# Altium PCB PCB1.PcbDoc
Units mm, origin at the board's own origin, x right, y up, seen from the top; angles counter-clockwise.
Board outline 70.87 x 49.4 mm, 2 copper layers (Top Layer, Bottom Layer); 31 components, 13 nets, 109 pads, 4 vias.
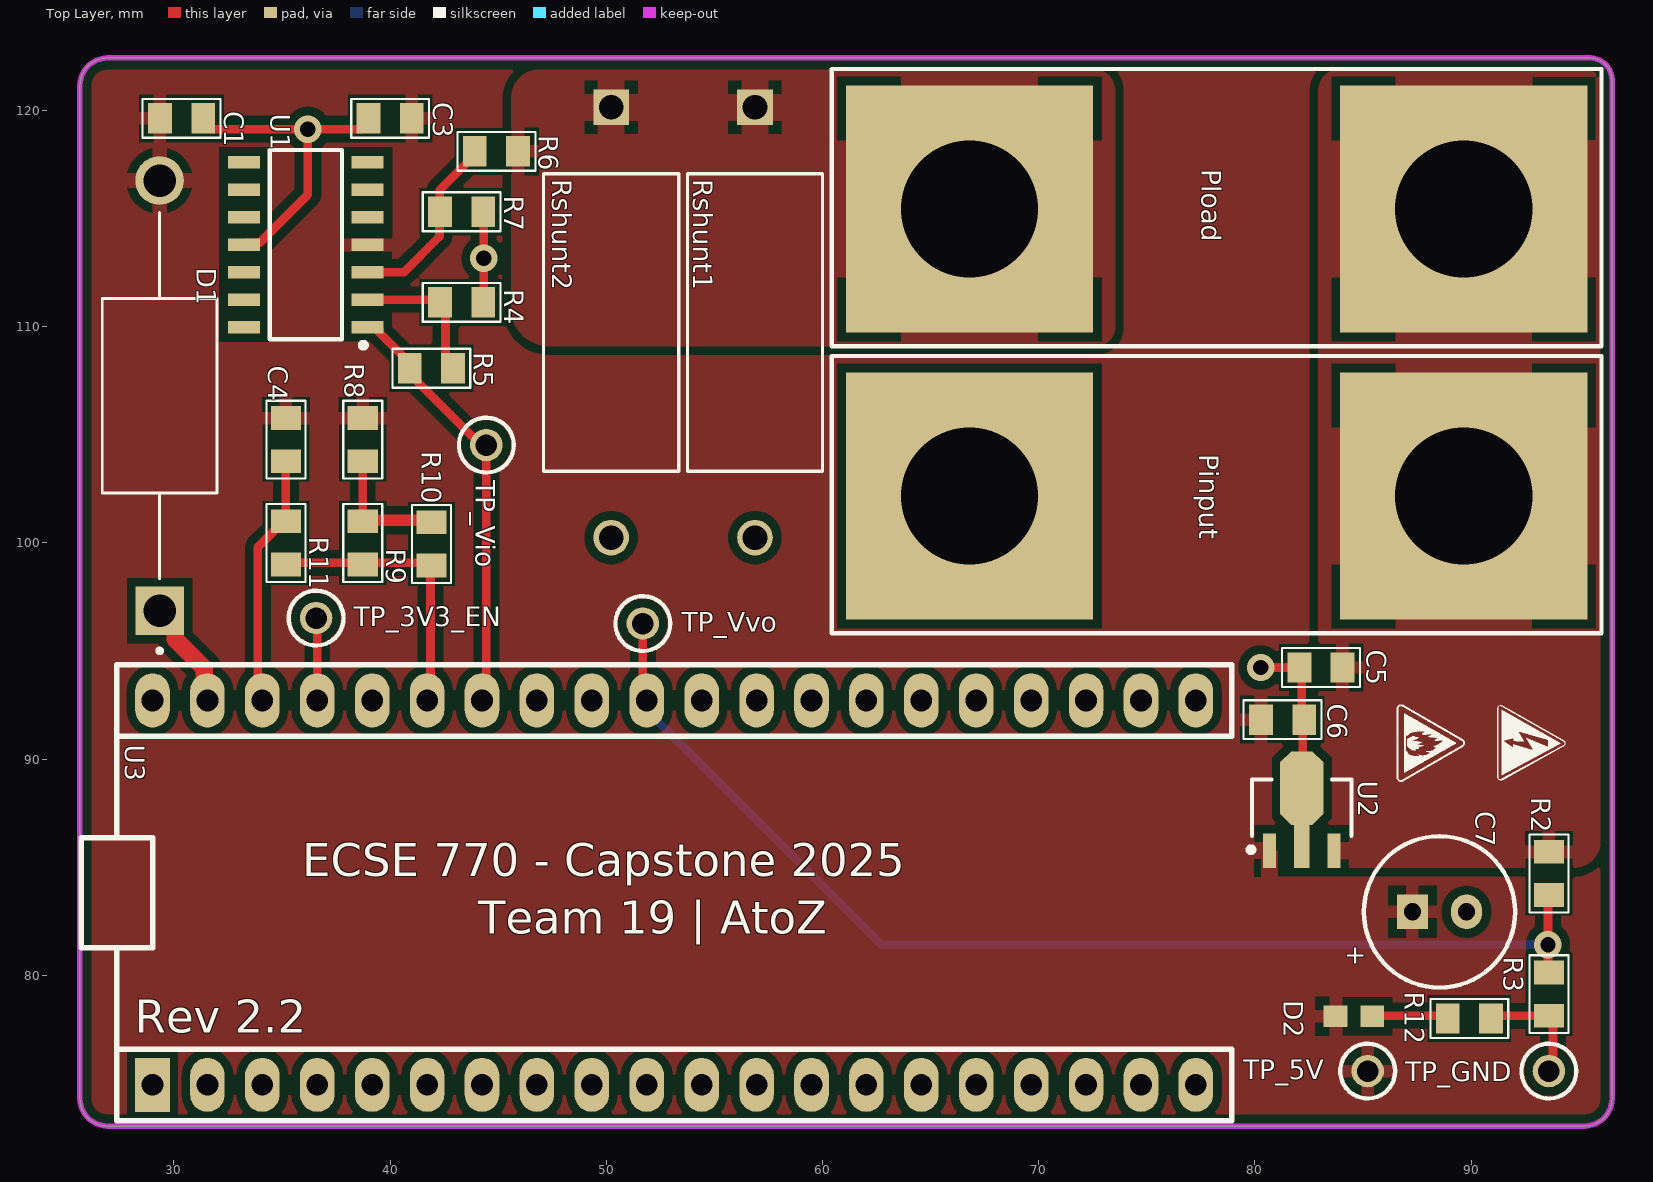
[diagram p0: Top Layer view]
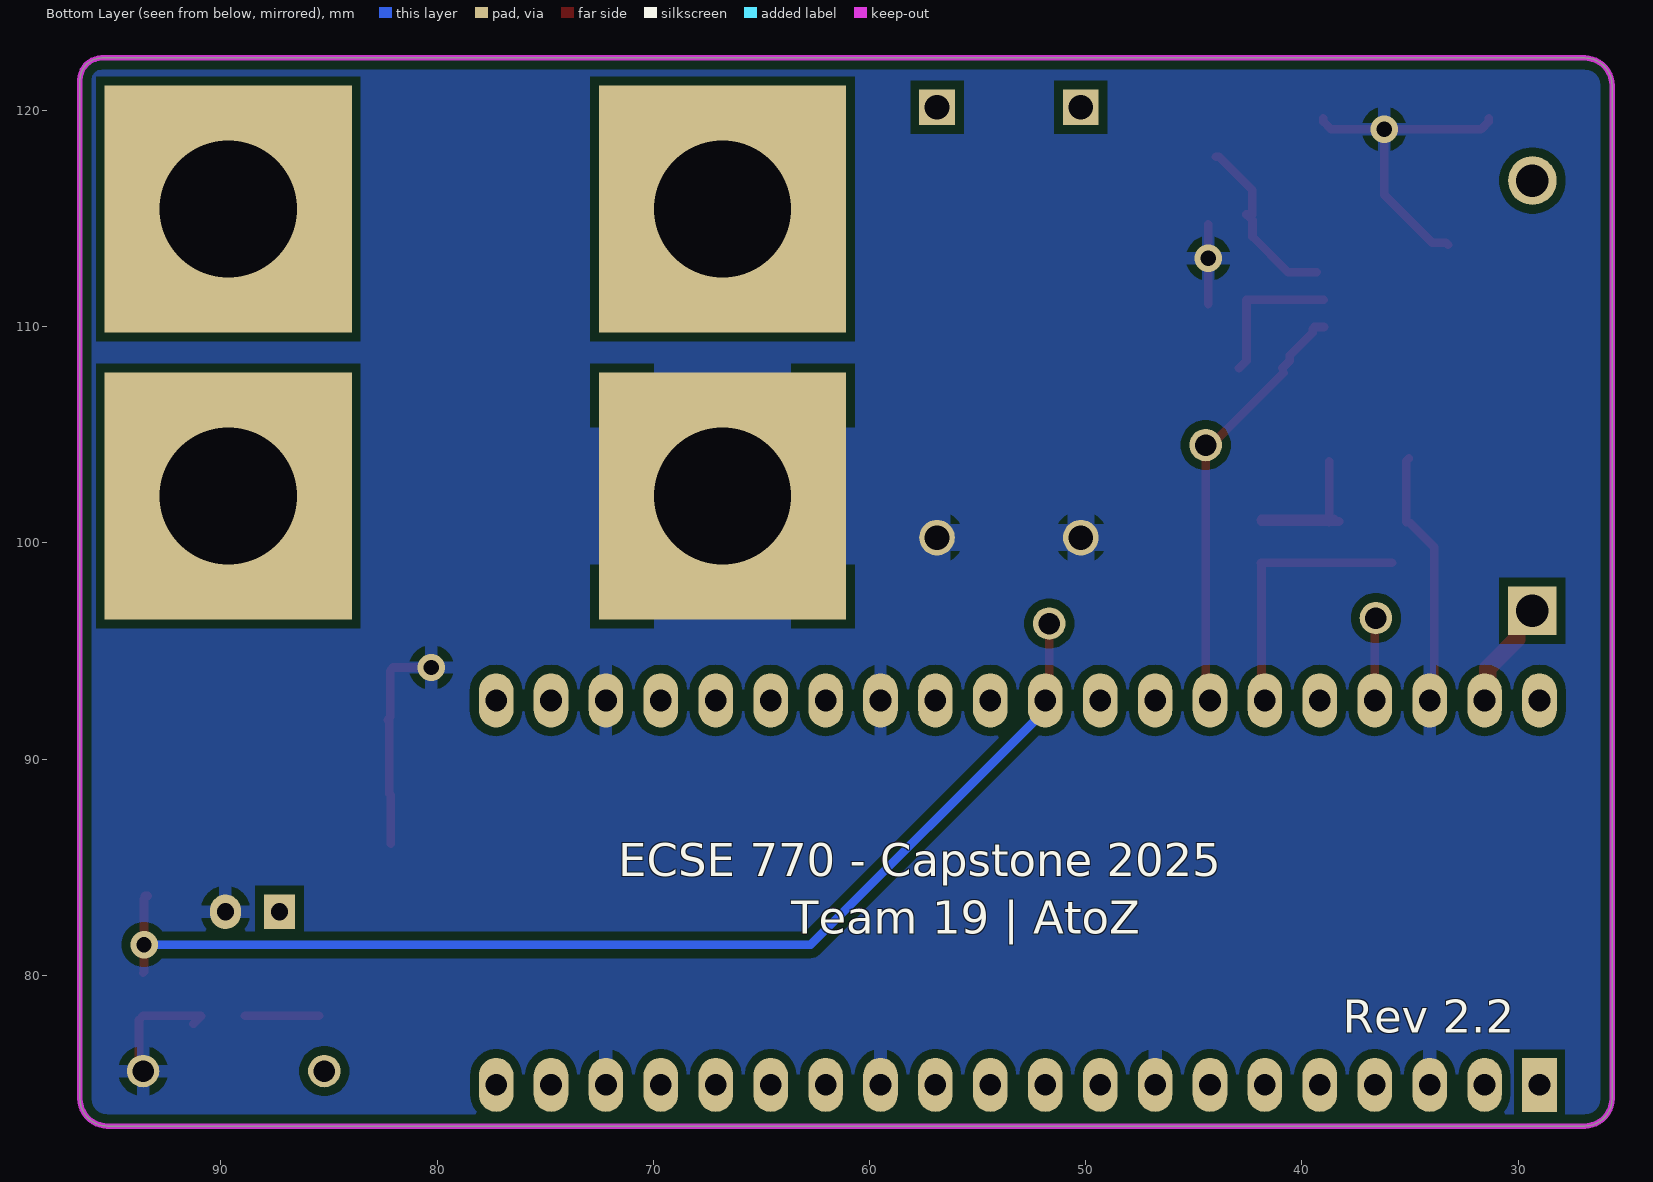
[diagram p1: Bottom Layer view, seen from below]

## Layer stack, top to bottom
Top Solder: solder mask 0.0102, Solder Resist, Dk 3.5
Top Layer: signal copper 0.0356
Dielectric 1: dielectric 0.32, FR-4, Dk 4.8
Bottom Layer: signal copper 0.0356
Bottom Solder: solder mask 0.0102, Solder Resist, Dk 3.5

## Board outline
26.924,73.025 cw(c26.924,74.295) 25.654,74.295 25.654,121.158 cw(c26.924,121.158) 26.924,122.428 95.504,122.428 cw(c95.504,121.412) 96.52,121.412 96.52,74.295 cw(c95.25,74.295) 95.25,73.025

## Design rules (kind name [scope] priority, off if disabled: settings)
Clearance [All] p1: gap=0.4 ignorepadtopadclearanceinfootprint=FALSE
HoleSize [All] p1: absolutevalues=TRUE maxlimit=10 minlimit=0.4 maxpercent=80.000 minpercent=20.000
PlaneConnect [All] p1: planeconnectstyle=Relief reliefexpansion=0.508 reliefentries=4 reliefconductorwidth=0.508 reliefairgap=0.254
PolygonConnect [All] p1: connectstyle=Relief reliefconductorwidth=0.6 reliefentries=4 polygonreliefangle="90 Angle" airgapwidth=0.4
RoutingVias [All] p1: holewidth=0.711 width=1.27 viastyle="Through Hole" minholewidth=0.711 minwidth=1.27 maxholewidth=0.711 maxwidth=1.27
SilkToSilkClearance [All] p1: silktosilkclearance=0.1
SilkToSolderMaskClearance [IsPad] p1: minsilkscreentomaskgap=0.1 clearancetoexposedcopper=TRUE
SolderMaskExpansion [All] p1: expansion=0.102 istentingtop=FALSE
SupplyNets "Schematic Supply Nets_8" [InNet('GND')] p1: voltage=0.000
SupplyNets "Schematic Supply Nets_7" [InNet('5V')] p2: voltage=0.000
SupplyNets "Schematic Supply Nets_5" [InNet('Vvo')] p3: voltage=0.000
SupplyNets "Schematic Supply Nets_4" [InNet('ADC_ref')] p4: voltage=0.000
SupplyNets "Schematic Supply Nets_3" [InNet('VCC')] p5: voltage=0.000
SupplyNets "Schematic Supply Nets_2" [InNet('Vio')] p6: voltage=0.000
SupplyNets "Schematic Supply Nets_1" [InNet('Vis')] p7: voltage=0.000
SupplyNets "Schematic Supply Nets" [InNet('Vsys')] p8: voltage=0.000
Width [All] p1: maxlimit=10 minlimit=0.4 preferedwidth=0.4
26 further rules are at their usual default settings.

## Components (designator, comment, footprint, x,y, rotation, side; value= is the part's Value field where it differs from the comment)
C1 "100n" "0805 CAP" 30.353,119.634 r0 top
C3 "100n" "0805 CAP" 40.005,119.634 r180 top
C4 "100n" "0805 CAP" 35.179,104.775 r270 top
C5 "100n" "0805 CAP" 83.058,94.234 r180 top
C6 "1u" "0805 CAP" 81.28,91.821 r0 top
C7 "10u" "CAP-RAD-2.5mm Pitch" 88.539,82.931 r0 top
D1 "SR304" DIOAD1990W125L900D530 29.337,106.807 r90 top
D2 "LTST-C191KRKT" 0603 84.582,78.105 r180 top
Pinput "Dual Banana Plugs" "Dual Banana Plug" 78.232,102.162 r180 top
Pload "Dual Banana Plugs" "Dual Banana Plug" 78.232,115.443 r180 top
R2 "10k" "0805 RES" 93.599,84.709 r90 top
R3 "1.5k" "0805 RES" 93.599,79.121 r90 top
R4 "1.2k" "0805 RES" 43.307,111.125 r180 top
R5 "10k" "0805 RES" 41.91,108.077 r180 top
R6 "1.2k" "0805 RES" 44.918,118.11 r180 top
R7 "10k" "0805 RES" 43.307,115.316 r180 top
R8 "680" "0805 RES" 38.735,104.775 r90 top
R9 "12k" "0805 RES" 38.735,99.994 r90 top
R10 "12k" "0805 RES" 41.91,99.949 r90 top
R11 "10k" "0805 RES" 35.179,99.994 r270 top
R12 "150" "0805 RES" 89.916,78 r180 top
Rshunt1 "ER74R10KT" RES_ER74_TYCO_TYC 56.877,120.142 r270 top
Rshunt2 "ER74R10KT" RES_ER74_TYCO_TYC 50.222,120.142 r270 top
TP_3V3_EN "5003" TP_TH 36.576,96.52 r270 top
TP_5V "5003" TP_TH 85.217,75.565 r0 top
TP_GND "5003" TP_TH 93.599,75.565 r0 top
TP_Vio "5003" TP_TH 44.45,104.521 r270 top
TP_Vvo "5003" TP_TH 51.689,96.266 r270 top
U1 "LM324DR2G" SOIC-14 36.104,113.792 r180 top
U2 "L78L05" SOT-89 82.169,87.757 r90 top
U3 "SC0918" "RP Pico Header V2" 29.011,74.93 r90 top

## Footprints (in the part's own frame and the unit in brackets; to place one, negate y for a bottom-side part, rotate by r counter-clockwise, add the part's x,y. Pads: shape width x height; smd on the part's side, far side on the other; paste and mask are expansions set on the pad)
0603 [mm]
  rect 1.1x1 smd: 1(-0.85,0) 2(0.85,0)
"0805 CAP" [mm] "http://www.digikey.co.nz/Web%20Export/Supplier%20Content/Vishay_8026/PDF/VishayBeyschlag_SolderPad.pdf?redirected=1 with dimension G modified by +0.25mm"
  rect 1.1x1.4 smd: 1(-1,0) 2(1,0)
  silkscreen extent -1.8,-0.9 1.8,0.9, body extent -1.04,-0.66 1.04,0.66, height 0.61
"0805 RES" [mm] "http://www.digikey.co.nz/Web%20Export/Supplier%20Content/Vishay_8026/PDF/VishayBeyschlag_SolderPad.pdf?redirected=1 with dimension G modified by +0.25mm"
  rect 1.1x1.4 smd: 1(-1,0) 2(1,0)
  silkscreen extent -1.8,-0.9 1.8,0.9, body extent -1.04,-0.66 1.04,0.66, height 0.61
"CAP-RAD-2.5mm Pitch" [mm] "Cap 6.3 X 11.2"
  rect 1.45x1.6 hole 0.8: 1(-1.25,0)
  oval 1.45x1.6 hole 0.8: 2(1.25,0)
  silkscreen extent -3.5,-3.5 3.5,3.5, body extent -3.15,-3.15 3.15,3.15, height 11.5
DIOAD1990W125L900D530 [mm]
  round 2.25 hole 1.5: A(9.95,0)
  rect 2.25x2.25 / inner round 2.25 / far side rect 2.25x2.25 hole 1.5: C(-9.95,0)
  silkscreen extent -11.9,-2.65 8.47,2.65, body extent -10.58,-2.8 10.58,2.8, height 5.6
"Dual Banana Plug" [mm] "Connector; 2 Position"
  rect 11.43x11.43 hole 6.35: 1(-11.43,0) 2(11.43,0)
  silkscreen extent -17.8,-6.48 17.8,6.35, body extent -17.38,-5.99 17.43,5.99, height 5.5
RES_ER74_TYCO_TYC [mil]
  rect 65x65 hole 45 paste-99999 mask+0: 1(0,0)
  round 65 hole 45 paste-99999 mask+0: 2(783.5,0)
  silkscreen extent 121,-123 663,123, body extent -17,-118 801,118, height 236
"RP Pico Header V2" [mm]
  rect 2.5x1.6 hole 1: 1(0,0)
  oval 2.5x1.6 hole 1: 2(0,-2.54) 3(0,-5.08) 4(0,-7.62) 5(0,-10.16) 6(0,-12.7) 7(0,-15.24) 8(0,-17.78) 9(0,-20.32) 10(0,-22.86) 11(0,-25.4) 12(0,-27.94) 13(0,-30.48) 14(0,-33.02) 15(0,-35.56) 16(0,-38.1) 17(0,-40.64) 18(0,-43.18) 19(0,-45.72) 20(0,-48.26) 21(17.78,-48.26) 22(17.78,-45.72) 23(17.78,-43.18) 24(17.78,-40.64) 25(17.78,-38.1) 26(17.78,-35.56) 27(17.78,-33.02) 28(17.78,-30.48) 29(17.78,-27.94) 30(17.78,-25.4) 31(17.78,-22.86) 32(17.78,-20.32) 33(17.78,-17.78) 34(17.78,-15.24) 35(17.78,-12.7) 36(17.78,-10.16) 37(17.78,-7.62) 38(17.78,-5.08) 39(17.78,-2.54) 40(17.78,0)
  silkscreen extent -1.65,-49.91 19.43,3.3, body extent -1.61,-49.66 19.39,2.67, height 12.6
SOIC-14 [mm] "SOIC, 14-Leads, Body 8.75x4mm, Pitch 1.27mm"
  rect 1.48x0.58 smd: 1(-2.86,3.81) 2(-2.86,2.54) 3(-2.86,1.27) 4(-2.86,0) 5(-2.86,-1.27) 6(-2.86,-2.54) 7(-2.86,-3.81) 8(2.86,-3.81) 9(2.86,-2.54) 10(2.86,-1.27) 11(2.86,0) 12(2.86,1.27) 13(2.86,2.54) 14(2.86,3.81)
  silkscreen extent -2.79,-4.38 1.67,4.77, body extent -3.1,-4.38 3.1,4.37, height 1.75
SOT-89 [mm] "SOT89, 3-Leads, Body 4.5x2.4 mm, Pitch 1.5mm, Lead Span 4.1mm, IPC Low Density"
  rect 1.6x0.6 smd: 1(-2,1.5) 3(-2,-1.5)
  rect 2x0.7 smd: 2(-1.8,0)
  oct 3.4x2 smd: 2(0.9,0)
  silkscreen extent -2.07,-2.3 1.3,2.47, body extent -2.25,-2.29 2,2.29, height 1.6
TP_TH [mm] "Test Point, Through Hole, Dia 2.54mm"
  round 1.5 hole 1: 1(0,0)
  silkscreen extent -1.27,-1.27 1.27,1.27, body extent -1.27,-1.27 1.27,1.27, height 4.57

## Part data
C1 C3 C4 C5 C6: library part CerCap_SMT_0805, "SMT ceramic capacitor 0805 size"
C7: library part ElecCap_TH_2P0, "Electrolytic capacitor with radial package, 2mm pitch and 5.2mm diameter", LatestRevisionDate=17-Jul-2002, LatestRevisionNote="Re-released for DXP Platform.", PackageDescription="Polarized Capacitor; 2 Leads", PackageReference=POLAR0.8, Published=8-Jun-2000, Publisher="Altium Limited"
D1: "3A, 40V, Schottky Rectifier", Package="DO-201AD Taiwan Semiconductor", Check_prices=https://www.snapeda.com/parts/SR304/Taiwan+Semiconductor/view-part/?ref=eda, MF="Taiwan Semiconductor", MP=SR304, SnapEDA_Link=https://www.snapeda.com/parts/SR304/Taiwan+Semiconductor/view-part/?ref=snap
D2: "http://octopart.com/ltst-c190krkt-lite-on-549893", Package=None, Availability=Unavailable, MP=LTST-C191KRKT, Price=None
Pinput Pload: library part AC_Output, "Dual banana plugs connection to the AC load", LatestRevisionDate=17-Jul-2002, LatestRevisionNote="Re-released for DXP Platform.", Publisher="Altium Limited"
R2 R3 R4 R5 R6 R7 R8 R9 R10 R11 R12: library part Res_SMT_0805, "0805 resistor", ComponentLink1Description=https://nz.mouser.com/datasheet/2/315/AOA0000C304-1149620.pdf, LatestRevisionDate=17-Jul-2002, LatestRevisionNote="Re-released for DXP Platform.", PackageReference=AXIAL-0.4, Published=8-Jun-2000, Publisher="Altium Limited"
Rshunt1 Rshunt2: "No Description Available", Mfr_Name="TE Connectivity", Digi-Key_Part_Number_1=A105885CT-ND, Digi-Key_Part_Number_2=A105885TB-ND
TP_3V3_EN TP_5V TP_GND TP_Vio TP_Vvo: library part TestPoint, "Test Point, Orange, 1-Pin THD, RoHS", Forward Current="3 A", Forward Voltage="1.08 V", Max Operating Temperature="150 degC", Max Surge Current="80 A", Min Operating Temperature="-65 degC", Package Quantity=500, Peak Reverse Current="600 uA", ComponentLink1Description="Manufacturer URL", ComponentLink1URL=http://www.keyelco.com/, ComponentLink2Description=Datasheet, ComponentLink2URL=http://keyelco.com/userAssets/file/M65p56.pdf, DatasheetVersion=Jun-15, Diameter="5.3 mm", Height="0.25 inch", Length="9.5 mm", Mount="Through Hole", PackageDescription="1-Pin Through Hole Device, Dia 2.54 mm", PackageReference=5003, Packaging=Bulk, Pins=2, Radiation Hardening=No, REACH SVHC="No SVHC", RoHSCompliant=true, Weight="0.01 lb", Width="0.25 inch"
U1: library part LM324DR_SMT_SOIC16, "Single Supply Quad Operational Amplifier, 3 to 32 V, 0 to 70 degC, 14-Pin SOIC, Pb-Free, Tape and Reel", Manufacturer="On Semiconductor", ComponentLink1Description="Manufacturer URL", ComponentLink1URL=http://www.onsemi.com/, ComponentLink2Description=Datasheet, ComponentLink2URL=http://www.onsemi.cn/pub_link/Collateral/LM324-D.PDF, ComponentLink3Description="Package Specification", ComponentLink3URL=http://www.onsemi.com/pub_link/Collateral/751A-03.PDF, DatasheetVersion="Rev. 25", Mounting Technology="Surface Mount", PackageDescription="14-Pin Small Outline Integrated Circuit, Body 8.65 x 3.9 mm, Pitch 1.27 mm", PackageReference=SOIC-14-751A-03, PackageVersion="Rev. K, 05/2011", Packing="Tape and Reel", PartNumber=LM324DR2G, RoHS=TRUE, VCC Max (V)=32, VCC Min (V)=3
U2: library part L78L05_SMT_SOT89, "LDO Voltage Regulator 5V", Supplier Part Number 1=497-1181-1-ND, ComponentLink1Description=http://www.st.com/content/ccc/resource/technical/document/datasheet/99/3b/7d/91/91/51/4b/be/CD00000544.pdf/files/CD00000544.pdf/jcr:content/translations/en.CD00000544.pdf, ComponentLink1URL=http://www.st.com/content/ccc/resource/technical/document/datasheet/99/3b/7d/91/91/51/4b/be/CD00000544.pdf/files/CD00000544.pdf/jcr:content/translations/en.CD00000544.pdf, Supplier 1=Digi-Key
U3: "RP2040 Raspberry Pi Pico - ARMÂ® CortexÂ®-M0+ MCU 32-Bit Embedded Evaluation Board", Package=None, Availability="In Stock", Check_prices=https://www.snapeda.com/parts/SC0918/Raspberry+Pi/view-part/?ref=eda, MF="Raspberry Pi", MP=SC0918, Price=None, Purchase-URL=https://pricing.snapeda.com/search/part/SC0918/?ref=eda, SnapEDA_Link=https://www.snapeda.com/parts/SC0918/Raspberry+Pi/view-part/?ref=snap

## Via types
v1: diameter 1.27, hole 0.711, Top Layer to Bottom Layer, 4 vias

## Nets (pads, with @x,y where several pads share a name; then routed paths per layer and width w, separated by ;. In a path a pad name is that pad's centre, name@x,y a point inside that pad or via, vN(x,y) a via of type N, cw(c..) or ccw(c..) an arc to the next point about the centre after c; other vN are vias at no path point)
5V: C1.1 C3.1 C4.1 C6.1 C7.1 D1.A D2.2 R8.2 TP_5V.1 U1.4 U2.1
ADC_ref: R9.1 R10.1 R11.2 U3.35 | length 12.5
  Top Layer w0.4: R11.2@35.814,99.076 38.735,99.076 R10.1@41.866,99.076 ; U3.35@41.866,92.71 R10.1@41.866,99.076 ; R10.1@41.91,99.076 R10.1@41.866,99.076
GND: C1.2 C3.2 C4.2 C5.2 C6.2 C7.2 Pinput.2 R3.1 R4.1 R7.1 R11.1 R12.1 Rshunt1.2 Rshunt2.2 TP_GND.1 U1.11 U2.2 U3.3 U3.8 U3.13 U3.18 U3.23 U3.28 U3.38 | length 47.1
  Top Layer w0.4: C1.2 31.353,119.484 31.703,119.134 36.187,119.134 v1(36.195,119.126) ; U1.11 33.334,113.882 33.973,113.882 36.195,116.104 v1(36.195,119.126) ; U3.38 33.879,92.922 33.879,99.799 35.029,100.949 35.179,100.949 R11.1 C4.2 C4.2@35.052,103.902 ; C3.2 39.005,119.484 38.655,119.134 36.203,119.134 v1(36.195,119.126) ; R4.1@44.323,111.033 v1(44.323,113.157) R7.1@44.323,114.724 ; v1(80.264,94.234) C5.2 ; C5.2@82.042,94.218 82.169,94.091 82.169,91.932 C6.2 82.209,91.75 82.209,88.405 82.138,88.334 U2.2@82.138,86.084 ; R12.1@91.266,77.755 90.916,78.105 90.932,78.121 R3.1 93.791,77.929 93.791,75.817 TP_GND.1@93.22,75.817
NetD2_1: D2.1 R12.2 | length 3.4
  Top Layer w0.4: D2.1@85.454,78.127 R12.2@88.9,78.127
NetR4_2: R4.2 R5.1 U1.2 | length 6.9
  Top Layer w0.4: U1.2@38.989,111.252 42.291,111.252 42.561,111.252 42.561,108.426 R5.1
NetR6_2: R6.2 R7.2 U1.3 | length 8.2
  Top Layer w0.4: U1.3@39.32,112.522 40.64,112.522 42.285,114.167 42.285,114.913 42.426,115.054 R7.2@42.561,115.189 ; R7.2@42.291,115.189 42.291,116.316 43.839,117.864 R6.2@43.989,117.864
NetR8_1: R8.1 R9.2 R10.2 | length 9.9
  Top Layer w0.4: R9.2@38.283,100.987 R10.2@41.872,100.987 ; R9.2@38.499,101.026 R9.2@38.537,100.987 ; R9.2@38.499,101.114 41.872,101.114 R10.2@41.91,101.076 ; R9.2@38.735,100.949 R8.1
NetTP_3V3_EN_1: TP_3V3_EN.1 U3.37 | length 3.8
  Top Layer w0.4: U3.37 36.631,96.194 TP_3V3_EN.1@36.83,96.393
VCC: C5.1 Pinput.1 Pload.1 R2.2 U2.3
Vio: R5.2 TP_Vio.1 U1.1 U3.34 | length 19.7
  Top Layer w0.4: U1.1 39.414,109.982 39.504,109.892 39.504,109.721 40.56,108.665 40.56,108.427 R5.2 ; R5.2@40.85,107.867 TP_Vio.1@44.132,104.584 ; TP_Vio.1@44.196,104.648 44.196,104.35 44.45,104.096 U3.34@44.45,92.71
Vis: Pload.2 R6.1 Rshunt1.1 Rshunt2.1
Vsys: D1.C U3.39 | length 5.1
  Top Layer w0.8: D1.C 30.062,96.132 30.062,95.541 31.398,94.205 31.398,92.863 U3.39
Vvo: R2.1 R3.2 TP_Vvo.1 U3.31 | length 53.9
  Top Layer w0.4: U3.31 51.689,92.892 51.689,95.714 51.943,95.968 TP_Vvo.1@51.943,96.266 ; R2.1@93.388,83.682 93.556,83.514 v1(93.556,81.418) 93.556,80.164 R3.2 ; R2.1@93.472,83.639 R2.1@93.515,83.682
  Bottom Layer w0.4: U3.31 51.871,92.26 62.724,81.407 v1@93.345,81.407
pads on no net: U1.5 U1.6 U1.7 U1.8 U1.9 U1.10 U1.12 U1.13 U1.14 U3.1 U3.2 U3.4 U3.5 U3.6 U3.7 U3.9 U3.10 U3.11 U3.12 U3.14 U3.15 U3.16 U3.17 U3.19 U3.20 U3.21 U3.22 U3.24 U3.25 U3.26 U3.27 U3.29 U3.30 U3.32 U3.33 U3.36 U3.40

## Polygon pours and split planes (outlines as drawn)
5V on Top Layer "5V_L01_P005" (solid, pour order 5): 25.654,122.428 96.52,122.428 96.52,73.025 25.654,73.025
VCC on Top Layer "VCC_L01_P003" (solid, pour order 3): 94.742,84.963 82.931,84.963 82.931,120.904 cw(c83.947,120.904) 83.947,121.92 95.25,121.92 cw(c95.25,121.158) 96.012,121.158 96.012,86.233 cw(c94.742,86.233)
Vis on Top Layer "VIS_L01_P004" (solid, pour order 4): 45.593,120.523 45.593,110.871 ccw(c47.371,110.871) 47.371,109.093 72.644,109.093 ccw(c72.644,109.982) 73.533,109.982 73.533,120.904 ccw(c72.517,120.904) 72.517,121.92 46.99,121.92 ccw(c46.99,120.523)
GND on Bottom Layer "GND_L02_P002" (solid, pour order 2): 25.654,122.428 96.52,122.428 96.52,73.025 25.654,73.025

## Keep-outs
Keep-Out Layer:
  the board outline again, w0.254

## Silkscreen, mask and mechanical layers (free items; w line width, h text height)
Top Overlay:
  drawing of 5 lines, arcs and shapes, not listed
  text "ECSE 770 - Capstone 2025" at 35.941,84.582 h1.52
  text "Team 19 | AtoZ" at 44.069,81.915 h1.52
  text "Rev 2.2" at 28.194,77.343 h1.52
Bottom Overlay:
  text "ECSE 770 - Capstone 2025" at 71.628,84.582 h1.52
  text "Team 19 | AtoZ" at 63.627,81.915 h1.52
  text "Rev 2.2" at 38.1,77.343 h1.52

## Text inside footprints (layer, text, board x,y; h text height)
C7: Top Overlay "+" at 84.139,80.531 h0.89